# Altium PCB TL203触摸板20514.PcbDoc
Units mm, origin at the board's own origin, x right, y up, seen from the top; angles counter-clockwise.
Board outline 47.62 x 54.61 mm, 2 copper layers (Top Layer, Bottom Layer); 13 components, 12 nets, 41 pads, 14 vias.
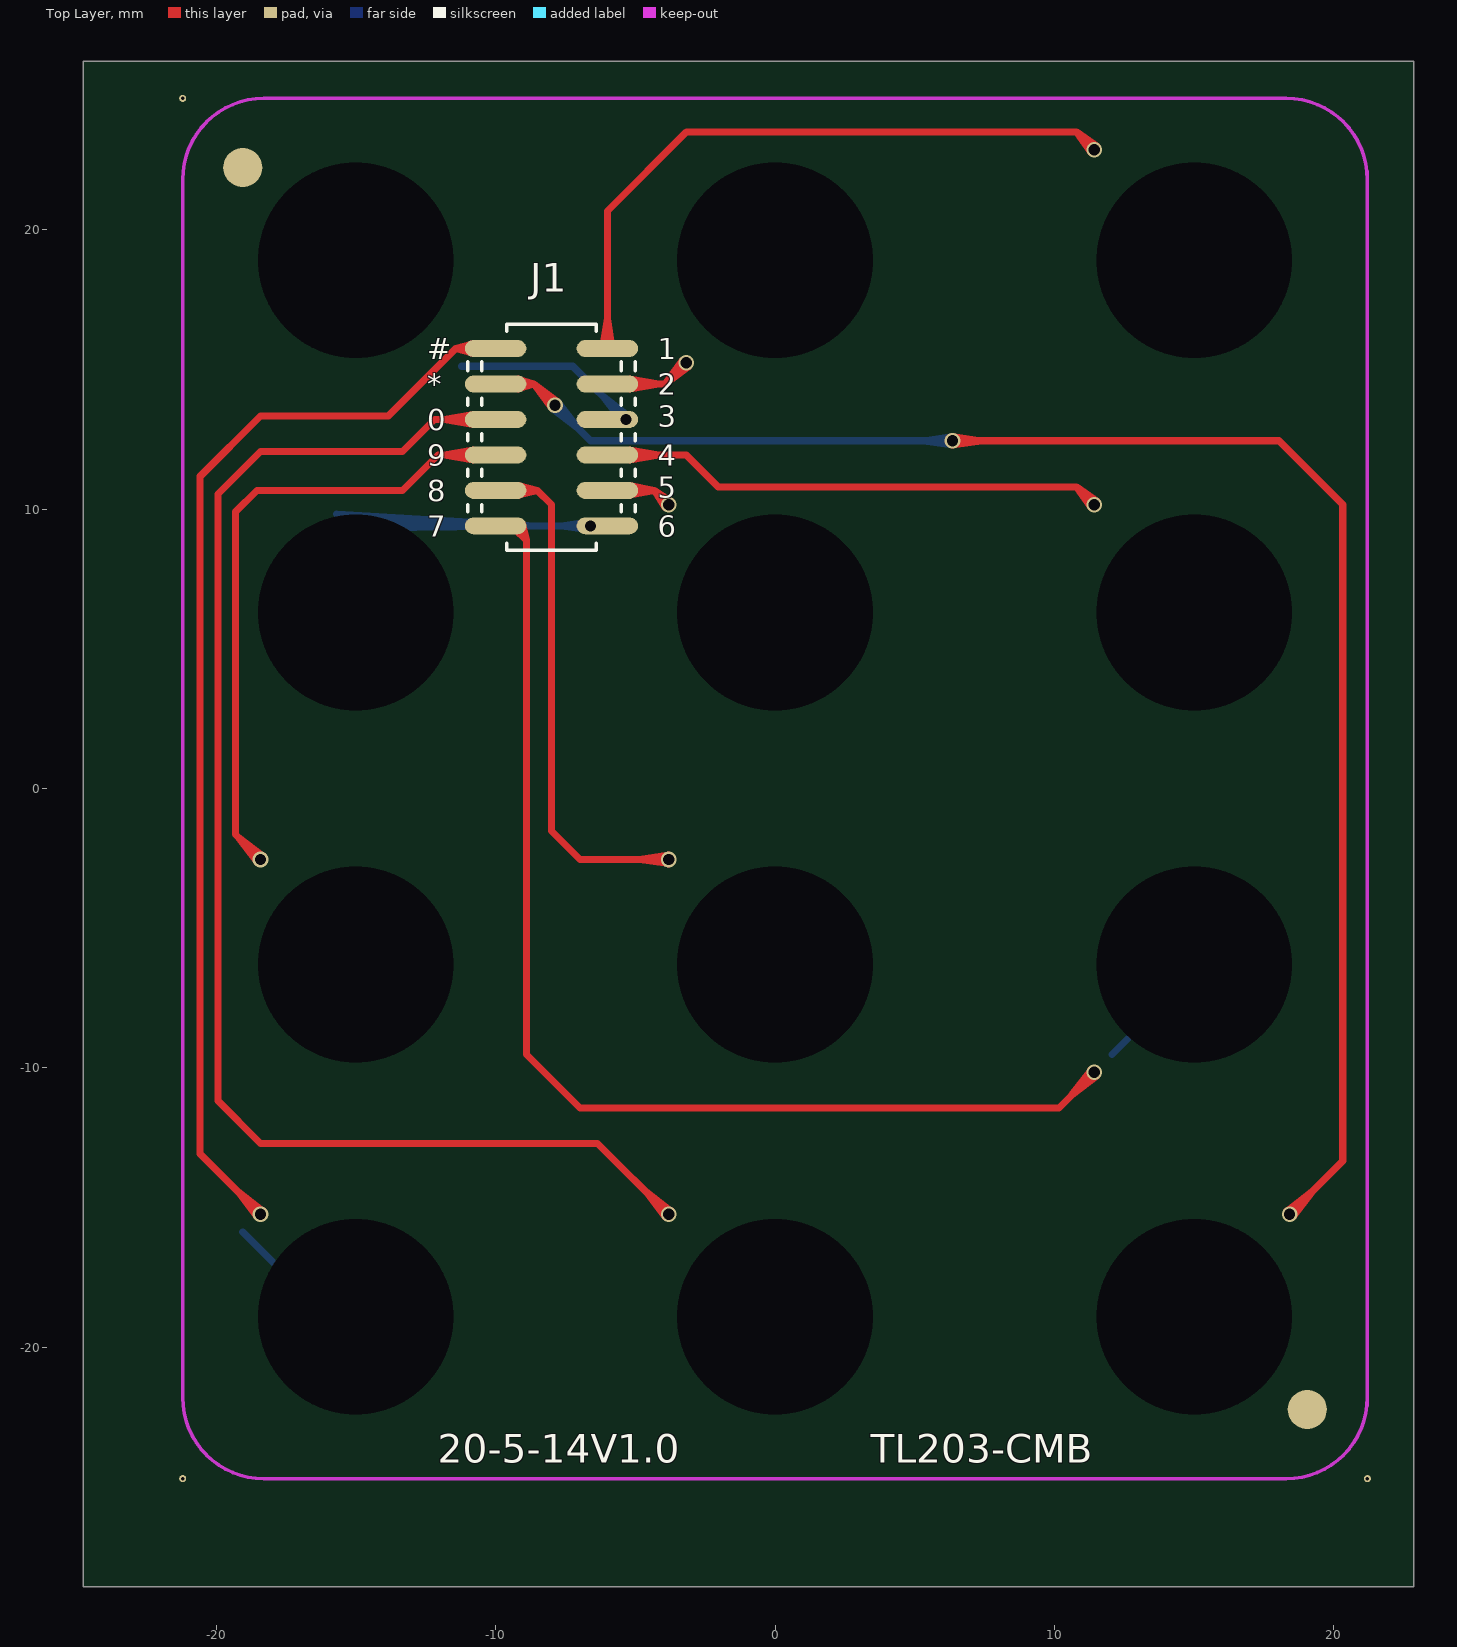
[diagram p0: Top Layer view]
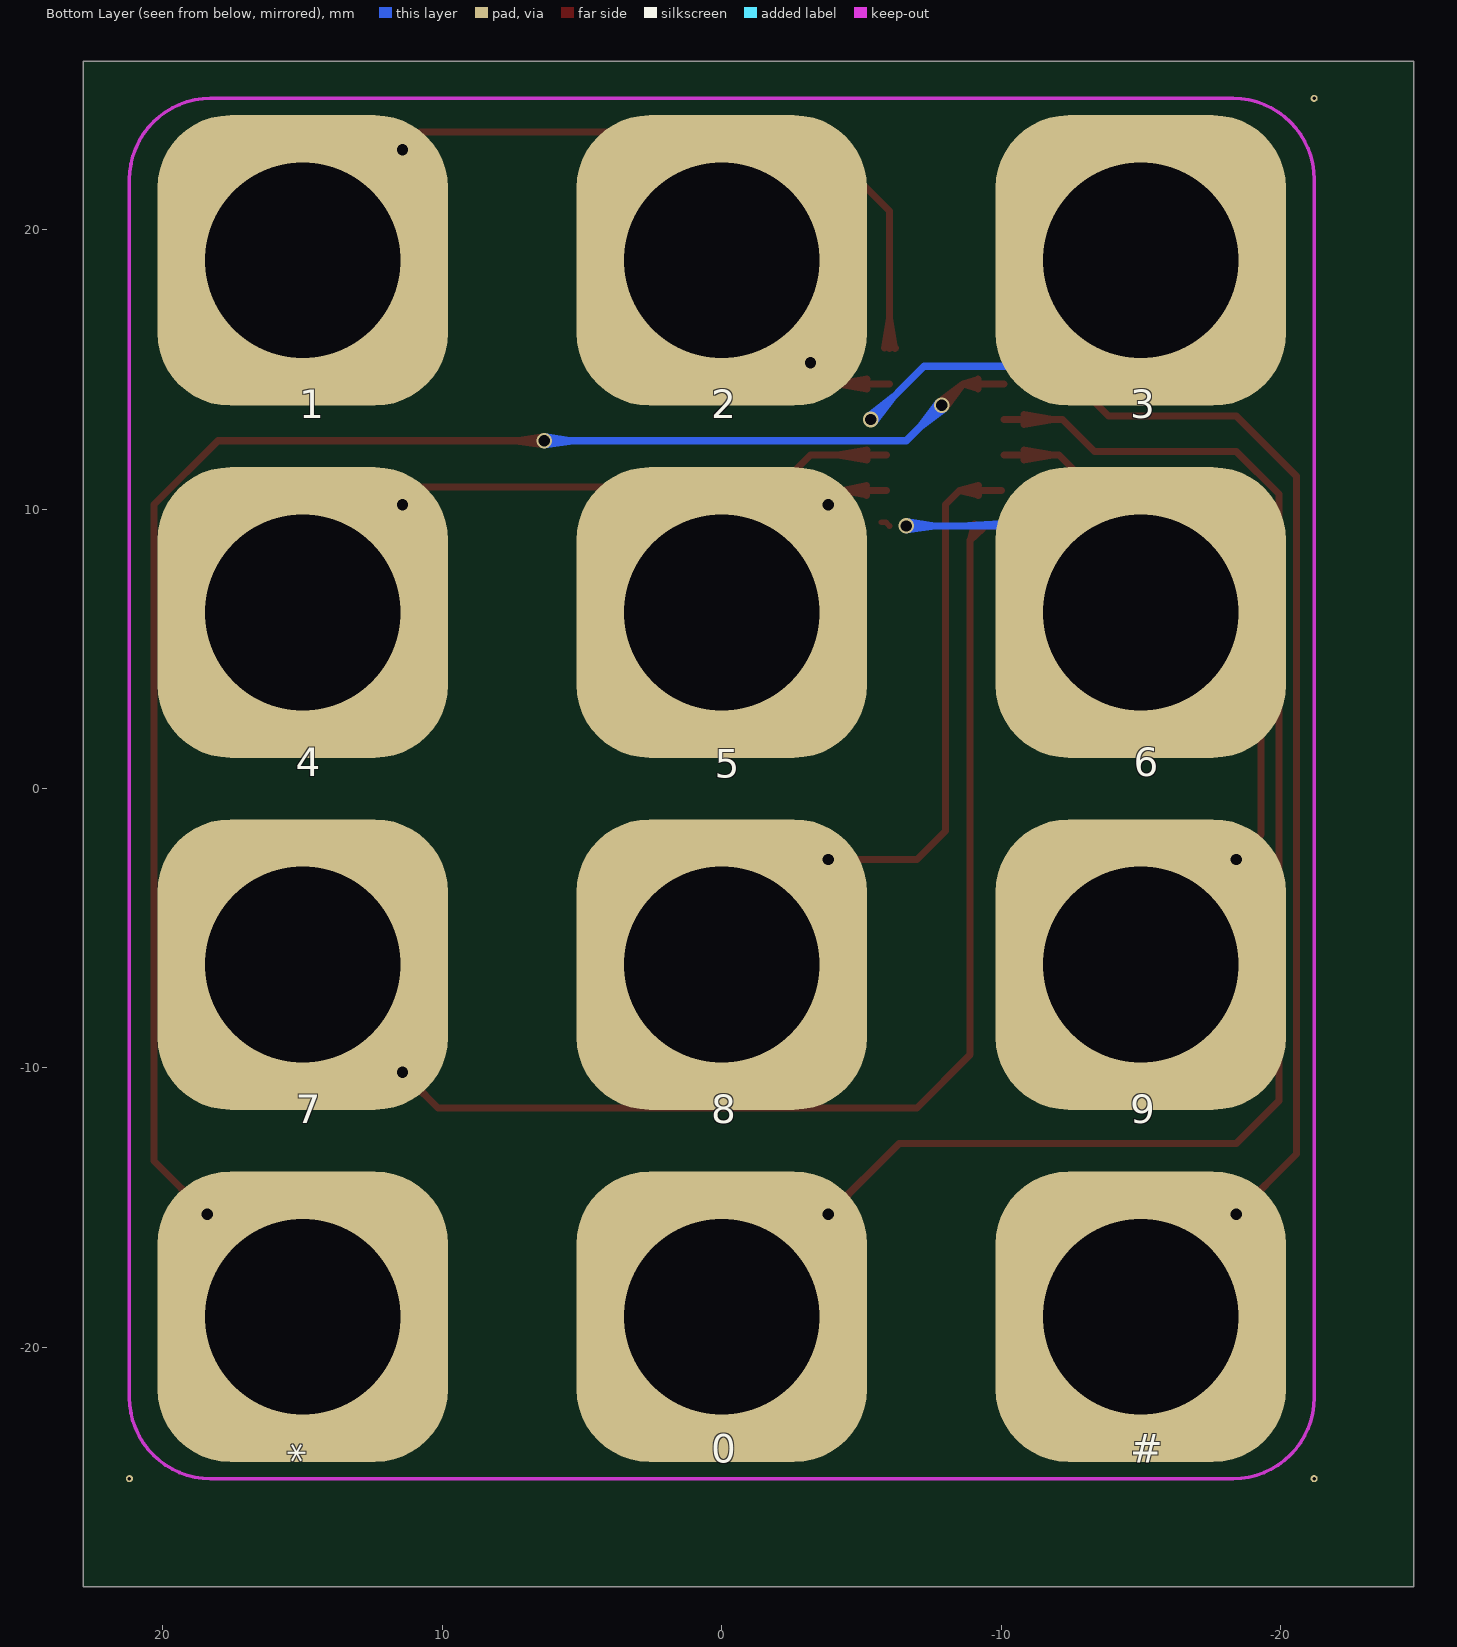
[diagram p1: Bottom Layer view, seen from below]

## Layer stack, top to bottom
Top Layer: signal copper 0.0356
Dielectric: dielectric 0.32, FR-4, Dk 4.8
Bottom Layer: signal copper 0.0356

## Board outline
-24.765,26.035 22.86,26.035 22.86,-28.575 -24.765,-28.575

## Design rules (kind name [scope] priority, off if disabled: settings)
Clearance [All] p1: gap=0.2
HoleSize [All] p1: absolutevalues=TRUE maxlimit=10 minlimit=0.025 maxpercent=80.000 minpercent=20.000
MinimumSolderMaskSliver [All] p1: minsoldermaskwidth=0
PolygonConnect [All] p1: connectstyle=Relief reliefconductorwidth=0.254 reliefentries=4 polygonreliefangle="90 Angle" airgapwidth=0.254
RoutingVias [All] p1: holewidth=0.711 width=1.27 viastyle="Through Hole" minholewidth=0.711 minwidth=1.27 maxholewidth=0.711 maxwidth=1.27
SilkToSolderMaskClearance SilkscreenOverComponentPads [IsPad] p1: minsilkscreentomaskgap=0 clearancetoexposedcopper=TRUE
SolderMaskExpansion [All] p1: expansion=0.102
Width [All] p1: maxlimit=1.016 minlimit=0.076 preferedwidth=0.254
25 further rules are at their usual default settings.

## Classes and differential pairs
component class TL203触摸板: 0 1 2 3 4 5 6 7 8 9 # *

## Components (designator, comment, footprint, x,y, rotation, side; value= is the part's Value field where it differs from the comment)
0 "K" 焊盘1 0,-18.9 r0 bottom
1 "K" 焊盘1 15,18.9 r0 bottom
2 "K" 焊盘1 0,18.9 r0 bottom
3 "K" 焊盘1 -15,18.9 r0 bottom
4 "K" 焊盘1 15,6.3 r0 bottom
5 "K" 焊盘1 0,6.3 r0 bottom
6 "K" 焊盘1 -15,6.3 r0 bottom
7 "K" 焊盘1 15,-6.3 r0 bottom
8 "K" 焊盘1 0,-6.3 r0 bottom
9 "K" 焊盘1 -15,-6.3 r0 bottom
# "K" 焊盘1 -15,-18.9 r0 bottom
* "K" 焊盘1 15,-18.9 r0 bottom
J1 "Header 12H" SMT-6P*2*1.27MM -8,12.573 r270 top

## Footprints (in the part's own frame and the unit in brackets; to place one, negate y for a bottom-side part, rotate by r counter-clockwise, add the part's x,y. Pads: shape width x height; smd on the part's side, far side on the other; paste and mask are expansions set on the pad)
SMT-6P*2*1.27MM [mm]
  oval 0.6x2.2 smd paste+0: 1(-3.175,2) 2(-3.175,-2) 3(-1.905,2) 4(-1.905,-2) 5(-0.635,2) 6(-0.635,-2) 7(0.635,2) 8(0.635,-2) 9(1.905,2) 10(1.905,-2) 11(3.175,2) 12(3.175,-2)
  silkscreen extent -4.04,-3 4.04,3
焊盘1 [mm]
  rrect50% 10.4x10.4 / inner rrect50% 0x0 / far side rrect50% 0x0 hole 7 unplated: 1(0,0)
  round 1 smd: 1(3.81,3.81)

## Part data
0 1 2 3 4 5 6 7 8 9 # *: library part KEY-1
J1: "Header, 12-Pin, Right Angle"

## Free pads (board coordinates)
  round 0.254 hole 0.127: 1(-21.2,-24.7) 2(-21.2,24.7) 3(21.2,-24.7)
  round 1.4 smd: MARK1(-19.05,22.225) MARK2(19.05,-22.225)

## Via types
v1: diameter 0.559, hole 0.406, Top Layer to Bottom Layer, tented both sides, 9 vias
v2: diameter 0.559, hole 0.406, Top Layer to Bottom Layer, 5 vias

## Nets (pads, with @x,y where several pads share a name; then routed paths per layer and width w, separated by ;. In a path a pad name is that pad's centre, name@x,y a point inside that pad or via, vN(x,y) a via of type N, cw(c..) or ccw(c..) an arc to the next point about the centre after c; other vN are vias at no path point)
KEY0: 0.1 J1.6 | length 56
  Top Layer w0.254: J1.6@-10.815,13.036 -11.863,13.208 ; J1.6@-10.815,13.38 -11.863,13.208 ; J1.6@-10.801,13.208 -11.863,13.208 ; J1.6@-10.101,13.208 -12.192,13.208 -13.335,12.065 -18.415,12.065 -19.939,10.541 -19.939,-11.176 -18.415,-12.7 -6.35,-12.7 v2(-3.81,-15.24) ; v2@-3.925,-15.34 -4.628,-14.422 v2@-3.71,-15.125
KEY1: 1.1 J1.1 | length 27.7
  Top Layer w0.254: J1.1@-6.223,15.77 J1.1@-6.201,15.748 ; J1.1@-6.173,15.762 -6.001,16.81 J1.1@-5.829,15.762 ; J1.1 -6.001,20.669 -3.175,23.495 10.795,23.495 ; v1@11.313,22.762 10.795,23.495 ; v1(11.43,22.86) 10.795,23.495 ; v1@11.528,22.977 10.795,23.495
KEY2: 2.1 J1.3 | length 8.5
  Top Layer w0.254: J1.3 -3.937,14.478 ; J1.3@-5.201,14.478 -4.139,14.478 ; J1.3@-5.187,14.306 -4.139,14.478 ; J1.3@-5.187,14.65 -4.139,14.478 ; v1@-3.29,15.34 -3.937,14.478 ; v1(-3.175,15.24) -3.937,14.478 ; v1@-3.075,15.125 -3.937,14.478
KEY3: 3.1 J1.5 | length 10.1
  Bottom Layer w0.254: 3.1@-11.213,15.113 -7.239,15.113 v1(-5.334,13.208) -6.152,14.026 ; v1@-5.449,13.108 -6.152,14.026 ; v1@-5.234,13.323 -6.152,14.026
KEY4: 4.1 J1.7 | length 23
  Top Layer w0.254: J1.7@-5.901,11.938 -3.175,11.938 -2.032,10.795 10.795,10.795 ; J1.7@-5.201,11.938 -4.139,11.938 ; J1.7@-5.187,11.766 -4.139,11.938 ; J1.7@-5.187,12.11 -4.139,11.938 ; v1@11.313,10.062 10.795,10.795 ; v1(11.43,10.16) 10.795,10.795 ; v1@11.528,10.277 10.795,10.795
KEY5: 5.1 J1.9 | length 6.4
  Top Layer w0.254: J1.9@-5.901,10.668 -4.318,10.668 ; J1.9@-5.201,10.668 -4.318,10.668 ; J1.9@-5.184,10.496 -4.318,10.668 ; J1.9@-5.184,10.84 -4.318,10.668 ; v1@-3.929,10.064 -4.318,10.668 ; v1(-3.81,10.16) -4.318,10.668 ; v1@-3.714,10.279 -4.318,10.668
KEY6: 6.1 J1.11 | length 29.3
  Top Layer w0.203: J1.11 -5.874,9.525 J1.11@-5.715,9.525
  Bottom Layer w0.254: 6.1@-15.701,9.306 -8.511,9.398 ; 6.1@-15.7,9.567 -8.511,9.398 ; 6.1@-15.689,9.828 -8.511,9.398 ; 6.1@-11.902,9.398 v1(-6.604,9.398) ; v1@-6.615,9.246 -7.645,9.398 v1@-6.615,9.55
KEY7: 7.1 J1.12 | length 49.6
  Top Layer w0.254: J1.12 -9.398,9.398 -8.89,8.89 ; J1.12@-9.334,9.287 -8.89,8.89 ; J1.12@-9.201,9.398 -8.89,8.89 ; J1.12@-9.042,9.466 -8.89,8.89 ; v2@11.315,-10.06 10.612,-10.978 v2@11.53,-10.275 ; v2(11.43,-10.16) 10.16,-11.43 -6.985,-11.43 -8.89,-9.525 -8.89,8.89
  Bottom Layer w0.254: 7.1@12.065,-9.525 7.1@15,-6.59
KEY8: 8.1 J1.10 | length 24
  Top Layer w0.254: J1.10 -8.509,10.668 ; J1.10@-9.201,10.668 -8.509,10.668 ; J1.10@-9.179,10.496 -8.509,10.668 ; J1.10@-9.179,10.84 -8.509,10.668 ; v2@-3.821,-2.692 -4.851,-2.54 v2@-3.821,-2.388 ; v2(-3.81,-2.54) -6.985,-2.54 -8.001,-1.524 -8.001,10.16 -8.509,10.668
  Bottom Layer w0.254: 8.1@-1.32,-6.3 8.1@0,-6.3
KEY9: 9.1 J1.8 | length 28.4
  Top Layer w0.254: v1@-18.53,-2.64 -19.233,-1.722 v1@-18.315,-2.425 ; v1(-18.415,-2.54) -19.304,-1.651 -19.304,9.906 -18.542,10.668 -13.335,10.668 -12.065,11.938 J1.8@-10.101,11.938 ; J1.8@-10.815,11.766 -11.863,11.938 ; J1.8@-10.815,12.11 -11.863,11.938 ; J1.8@-10.801,11.938 -11.863,11.938
KEY#: #.1 J1.2 | length 48.2
  Top Layer w0.254: v2@-18.53,-15.34 -19.233,-14.422 v2@-18.315,-15.125 ; v2(-18.415,-15.24) -20.574,-13.081 -20.574,11.176 -18.415,13.335 -13.843,13.335 -11.43,15.748 ; J1.2@-10.825,15.577 -11.43,15.748 ; J1.2@-10.825,15.919 -11.43,15.748 ; J1.2@-10.801,15.748 -11.43,15.748 ; J1.2@-10.101,15.748 -11.43,15.748
  Bottom Layer w0.254: #.1@-19.05,-15.875 #.1@-16.025,-18.9
KEY*: *.1 J1.4 | length 72.1
  Top Layer w0.254: J1.4@-10.101,14.478 -8.636,14.478 ; J1.4@-9.201,14.478 -8.636,14.478 ; J1.4@-9.175,14.307 -8.636,14.478 ; J1.4@-9.175,14.649 -8.636,14.478 ; v1@-7.989,13.616 -8.636,14.478 ; v1@-7.774,13.831 -8.636,14.478 ; v2(6.35,12.446) 18.034,12.446 20.32,10.16 20.32,-13.335 v1(18.415,-15.24) ; v2@6.361,12.294 7.391,12.446 v2@6.361,12.598 ; v1@18.315,-15.125 19.233,-14.422 v1@18.53,-15.34 ; -8.636,14.478 v1(-7.874,13.716) -8.636,14.478
  Bottom Layer w0.254: v1@-7.974,13.601 -7.056,12.898 v1@-7.759,13.816 ; v1(-7.874,13.716) -6.604,12.446 v2(6.35,12.446) ; v2@6.339,12.294 5.309,12.446 v2@6.339,12.598

## Keep-outs
Keep-Out Layer:
  lines w0.127: -21.2,-21.8 ccw(c-18.3,-21.8) -18.3,-24.7 18.3,-24.7 ccw(c18.3,-21.8) 21.2,-21.8 21.2,21.8 ccw(c18.3,21.8) 18.3,24.7 -18.3,24.7 ccw(c-18.3,21.8) -21.2,21.8 -21.2,-21.8

## Silkscreen, mask and mechanical layers (free items; w line width, h text height)
Top Overlay:
  text "#" at -12.446,15.367 h0.76
  text "1" at -4.191,15.367 h0.76
  text "*" at -12.446,14.097 h0.76
  text "2" at -4.191,14.097 h0.76
  text "3" at -4.191,12.954 h0.76
  text "0" at -12.446,12.827 h0.76
  text "9" at -12.446,11.557 h0.76
  text "4" at -4.191,11.557 h0.76
  text "5" at -4.191,10.414 h0.76
  text "8" at -12.446,10.287 h0.76
  text "7" at -12.446,9.017 h0.76
  text "6" at -4.191,9.017 h0.76
  text "20-5-14V1.0" at -12.065,-24.13 h1.02
  text "TL203-CMB" at 3.429,-24.13 h1.02
Mechanical 1:
  text "工艺要求:" at -21.59,36.195 h2.54
  text "1> 板材:FR-4" at -21.59,31.115 h1.27
  text "4> 触摸按键孔:不沉铜" at -5.715,31.115 h1.27
  text "7> 字符:白色双面" at 11.43,31.115 h1.27
  text "2> 板厚:1.2   mm" at -21.59,28.575 h1.27
  text "5> 阻焊:顶层绿油" at -5.715,28.575 h1.27
  text "8> 板框: Keep-out 层" at 11.43,28.575 h1.27
  text "3> 过孔:盖油" at -21.59,26.035 h1.27
  text "6> 阻焊:底面绿油" at -5.715,26.035 h1.27

## Dimensions
-21.2,-24.7 to 21.2,-24.7 on Mechanical 1
-21.2,24.7 to -21.2,-24.7 on Mechanical 1